# Altium PCB PCB.PcbDoc (part 1 of 2)
Units mm, origin at the board's own origin, x right, y up, seen from the top; angles counter-clockwise.
Board outline 50 x 50 mm, 4 copper layers (Top Layer, VCC, GND, Bottom Layer), stack 1.586 mm thick; 94 components, 159 nets, 762 pads, 321 vias.
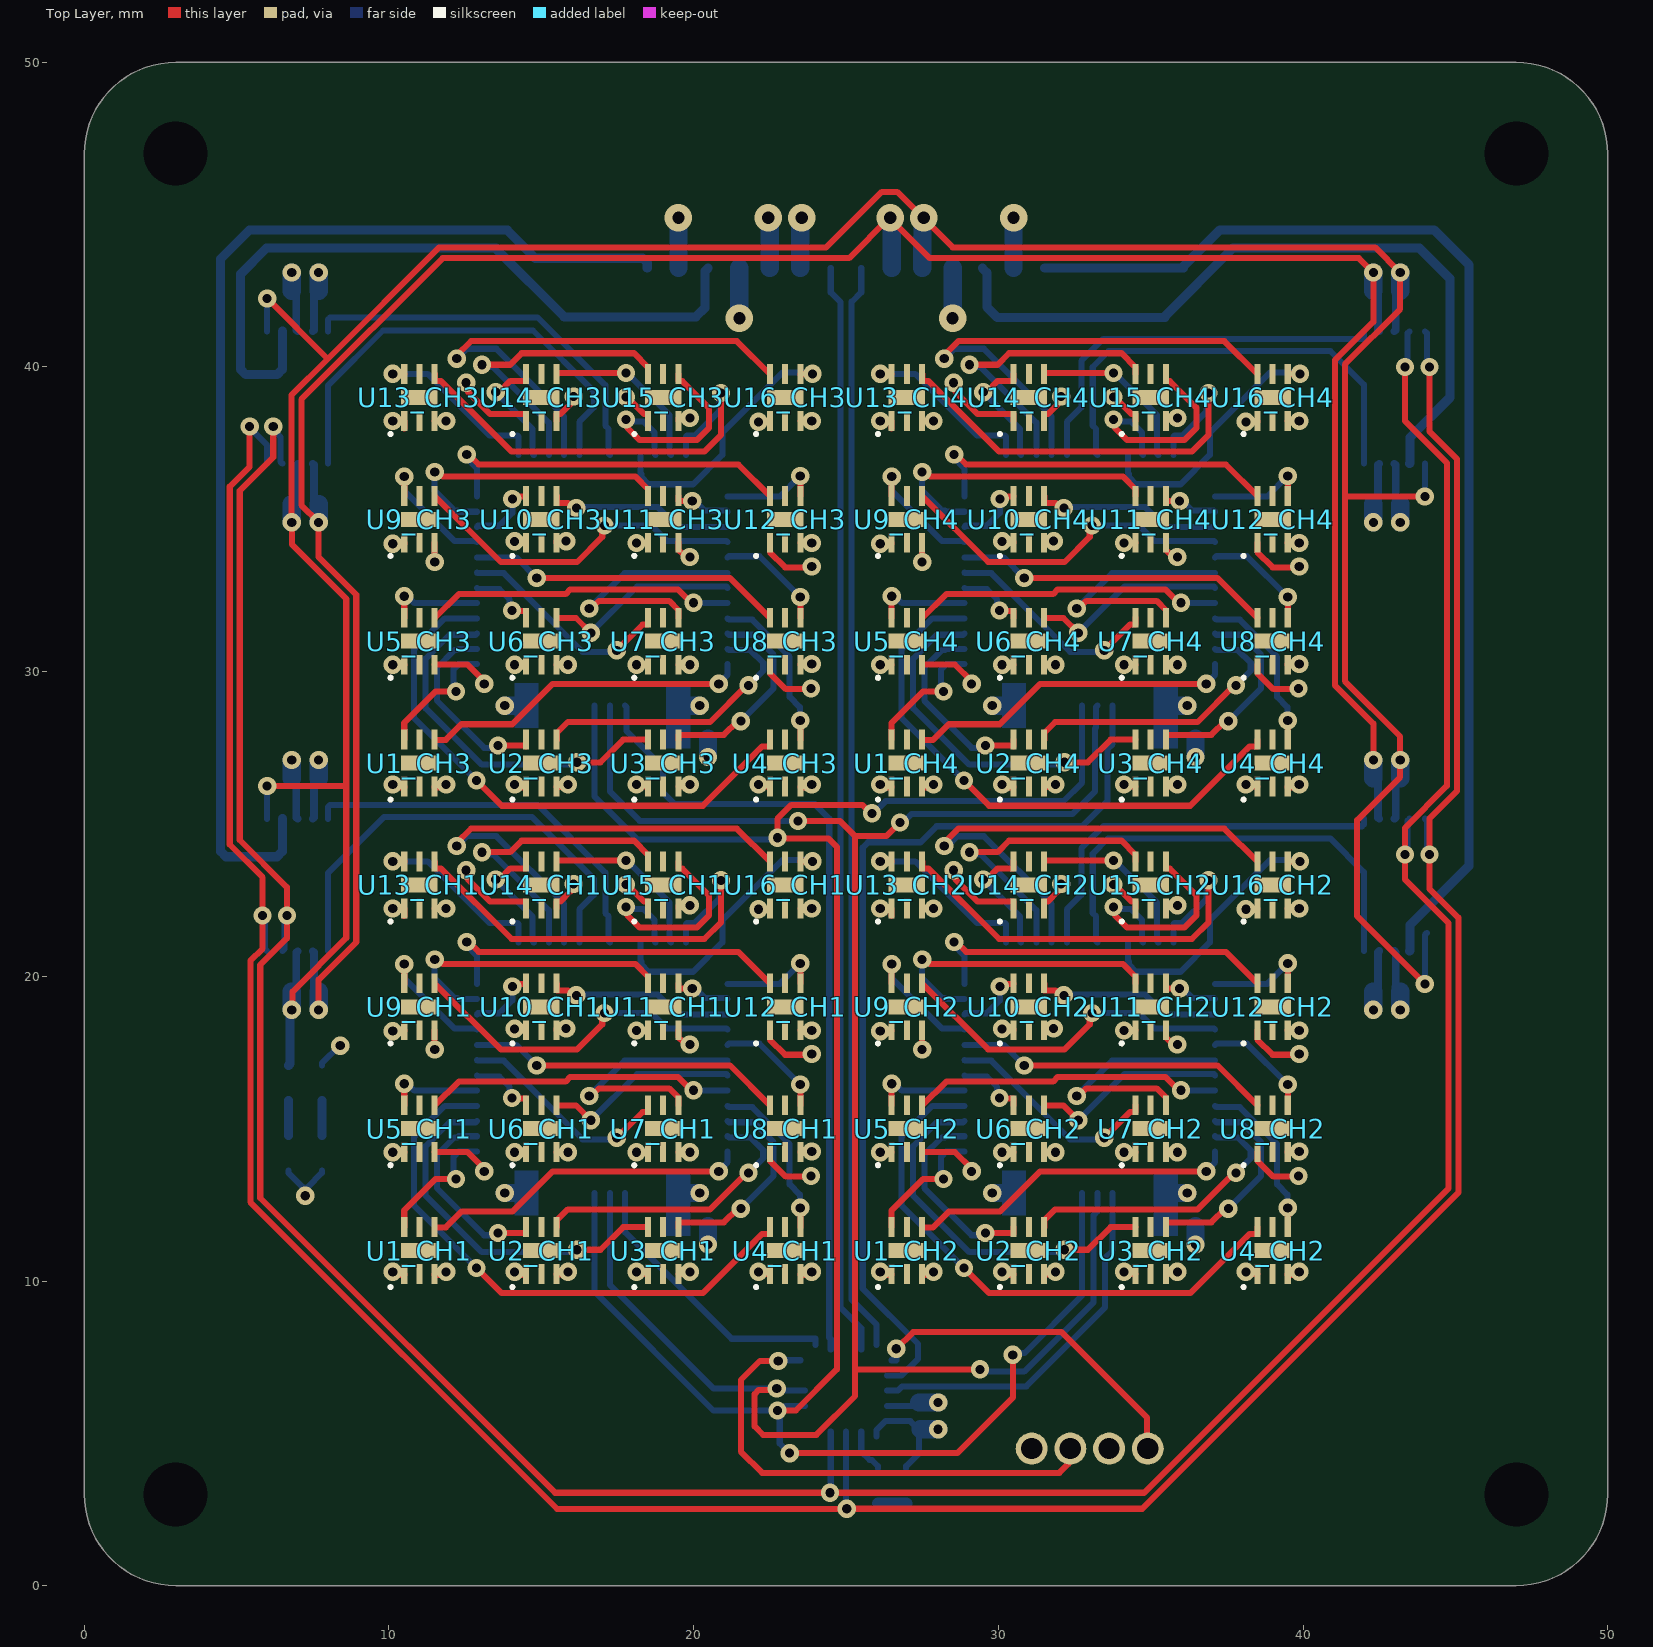
[diagram p0: Top Layer view]
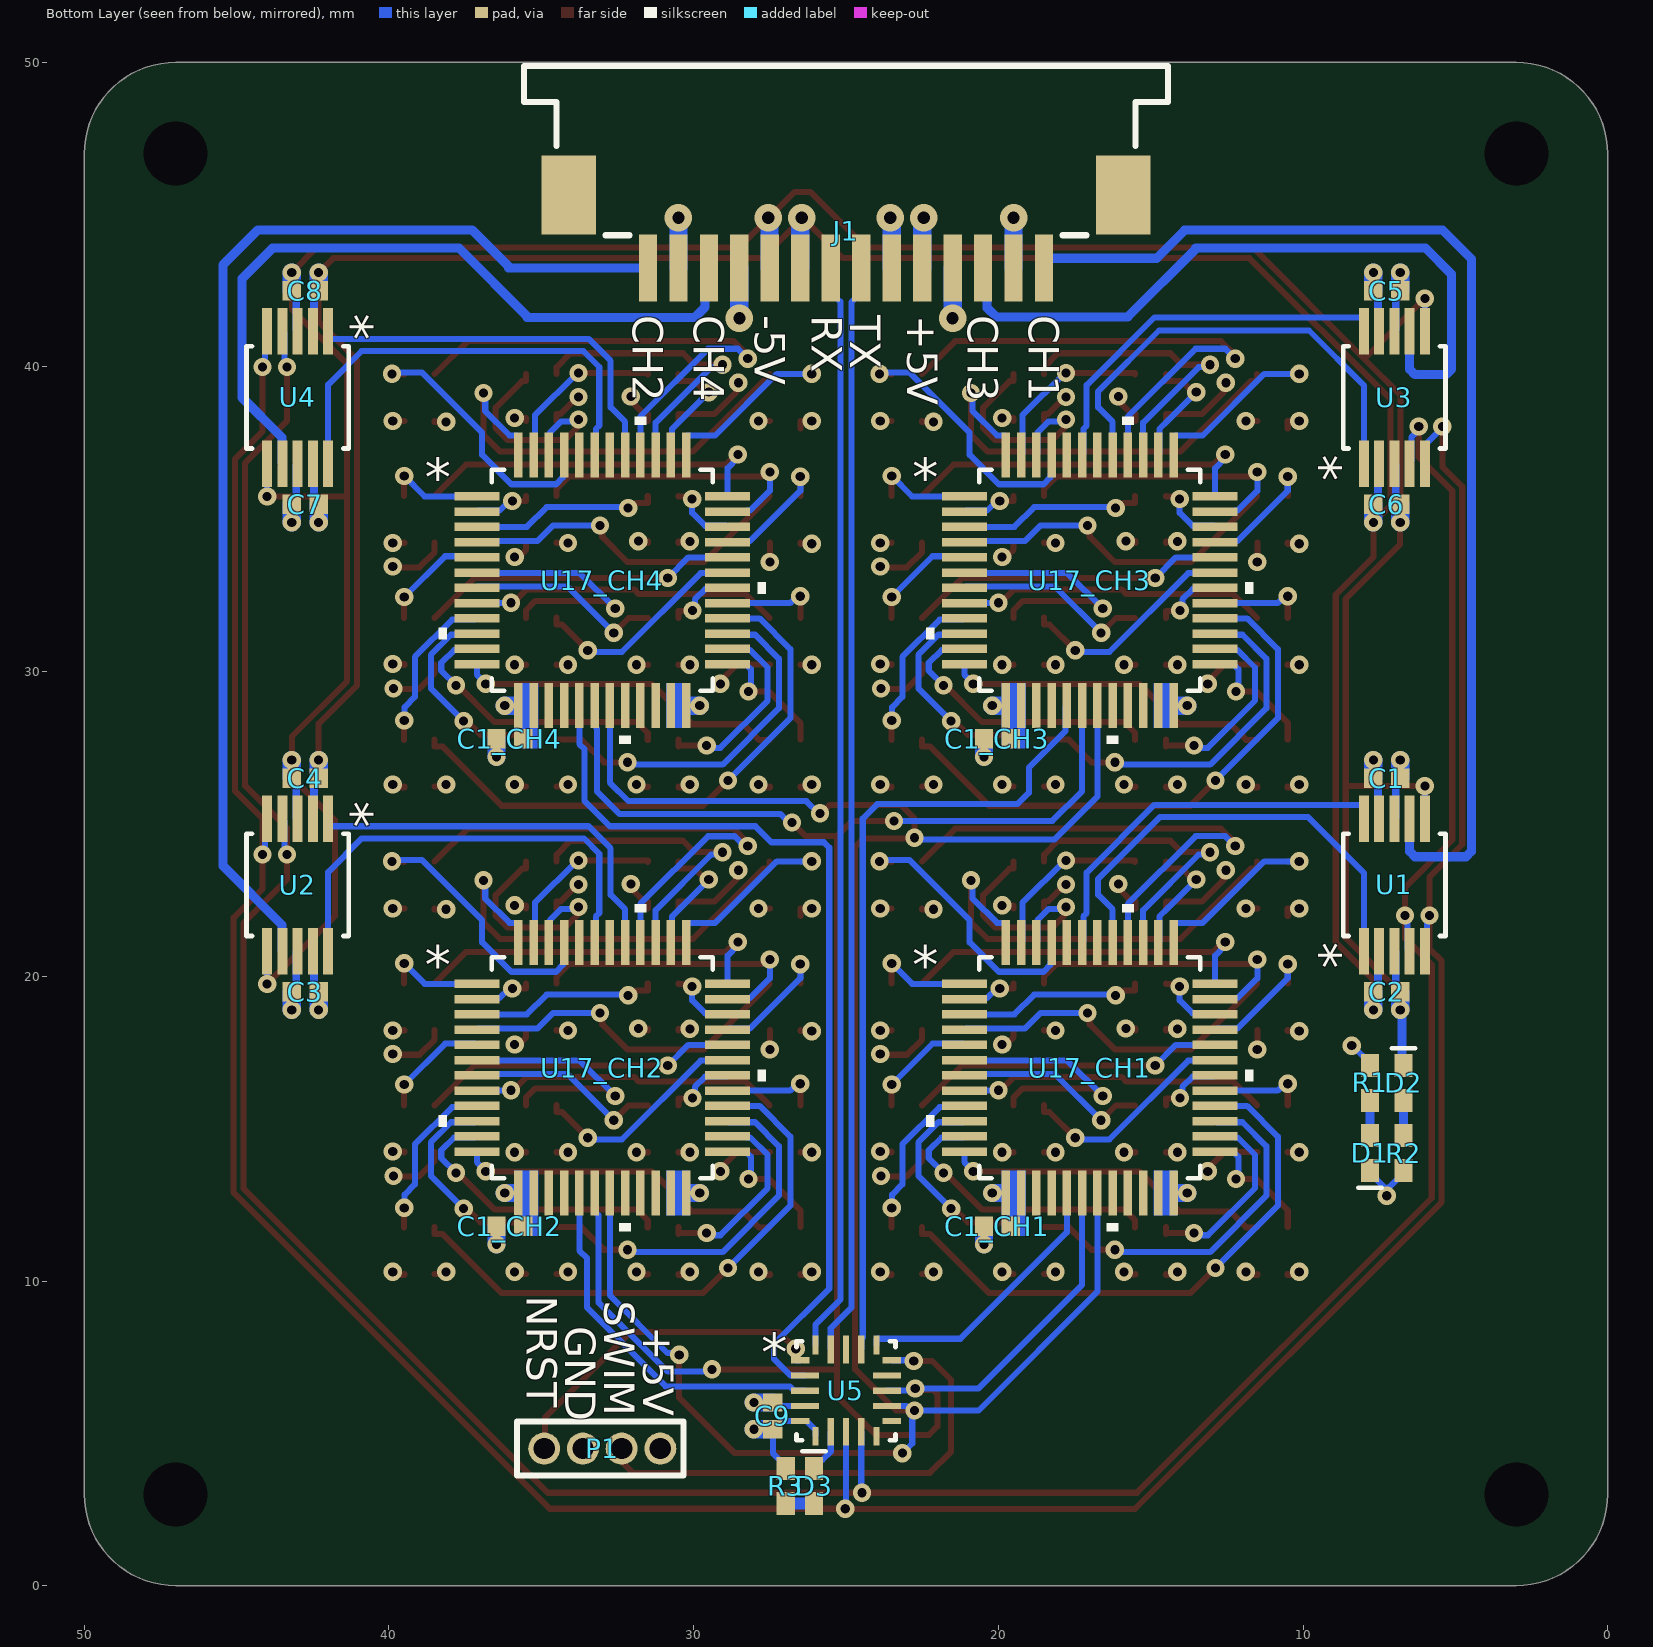
[diagram p1: Bottom Layer view, seen from below]
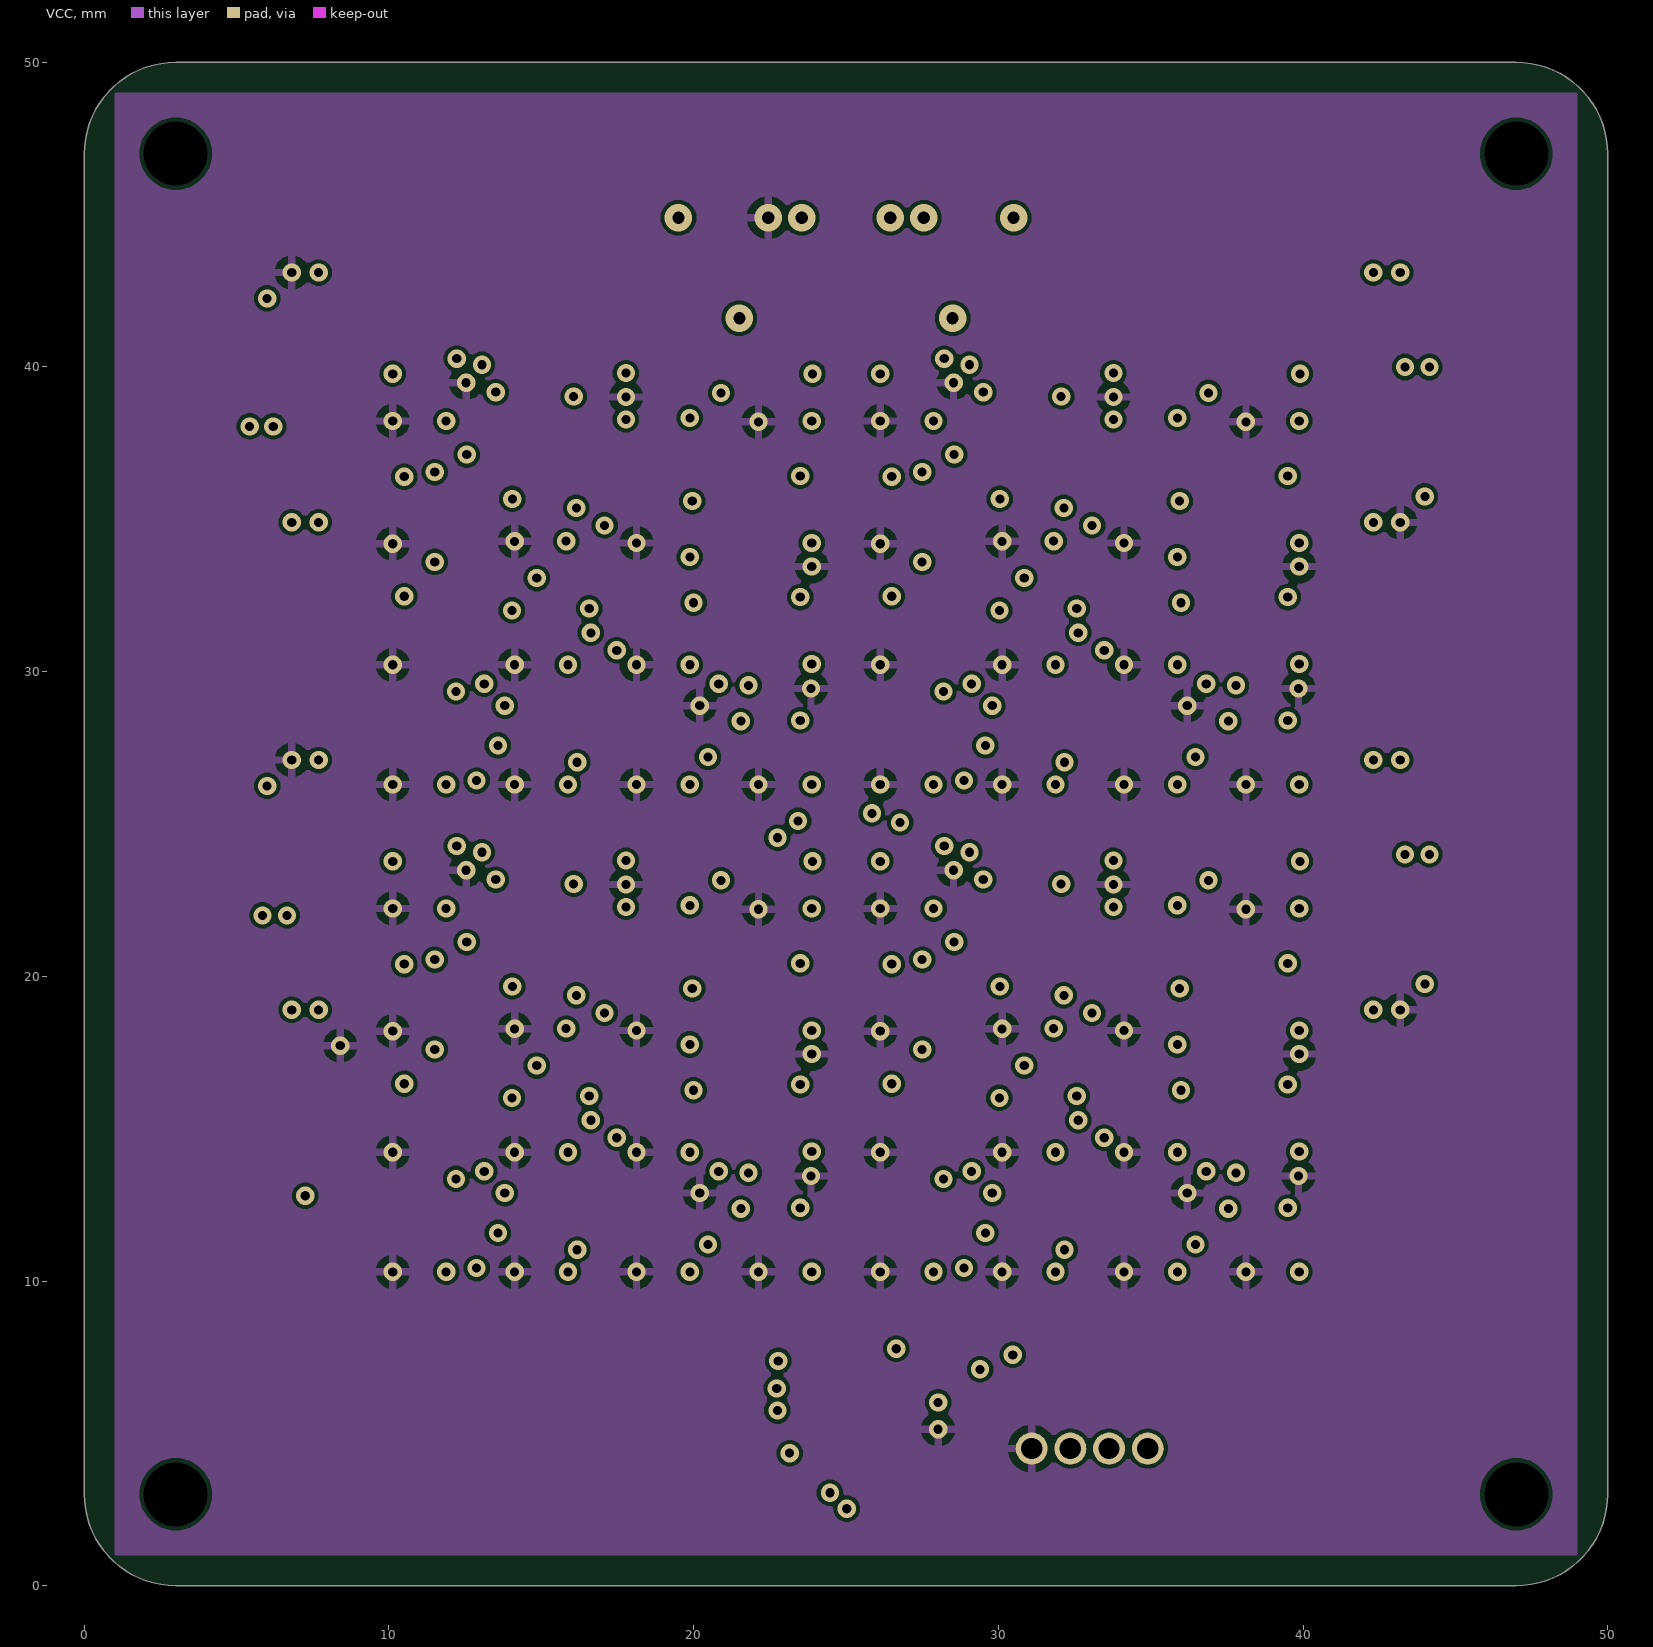
[diagram p2: VCC]
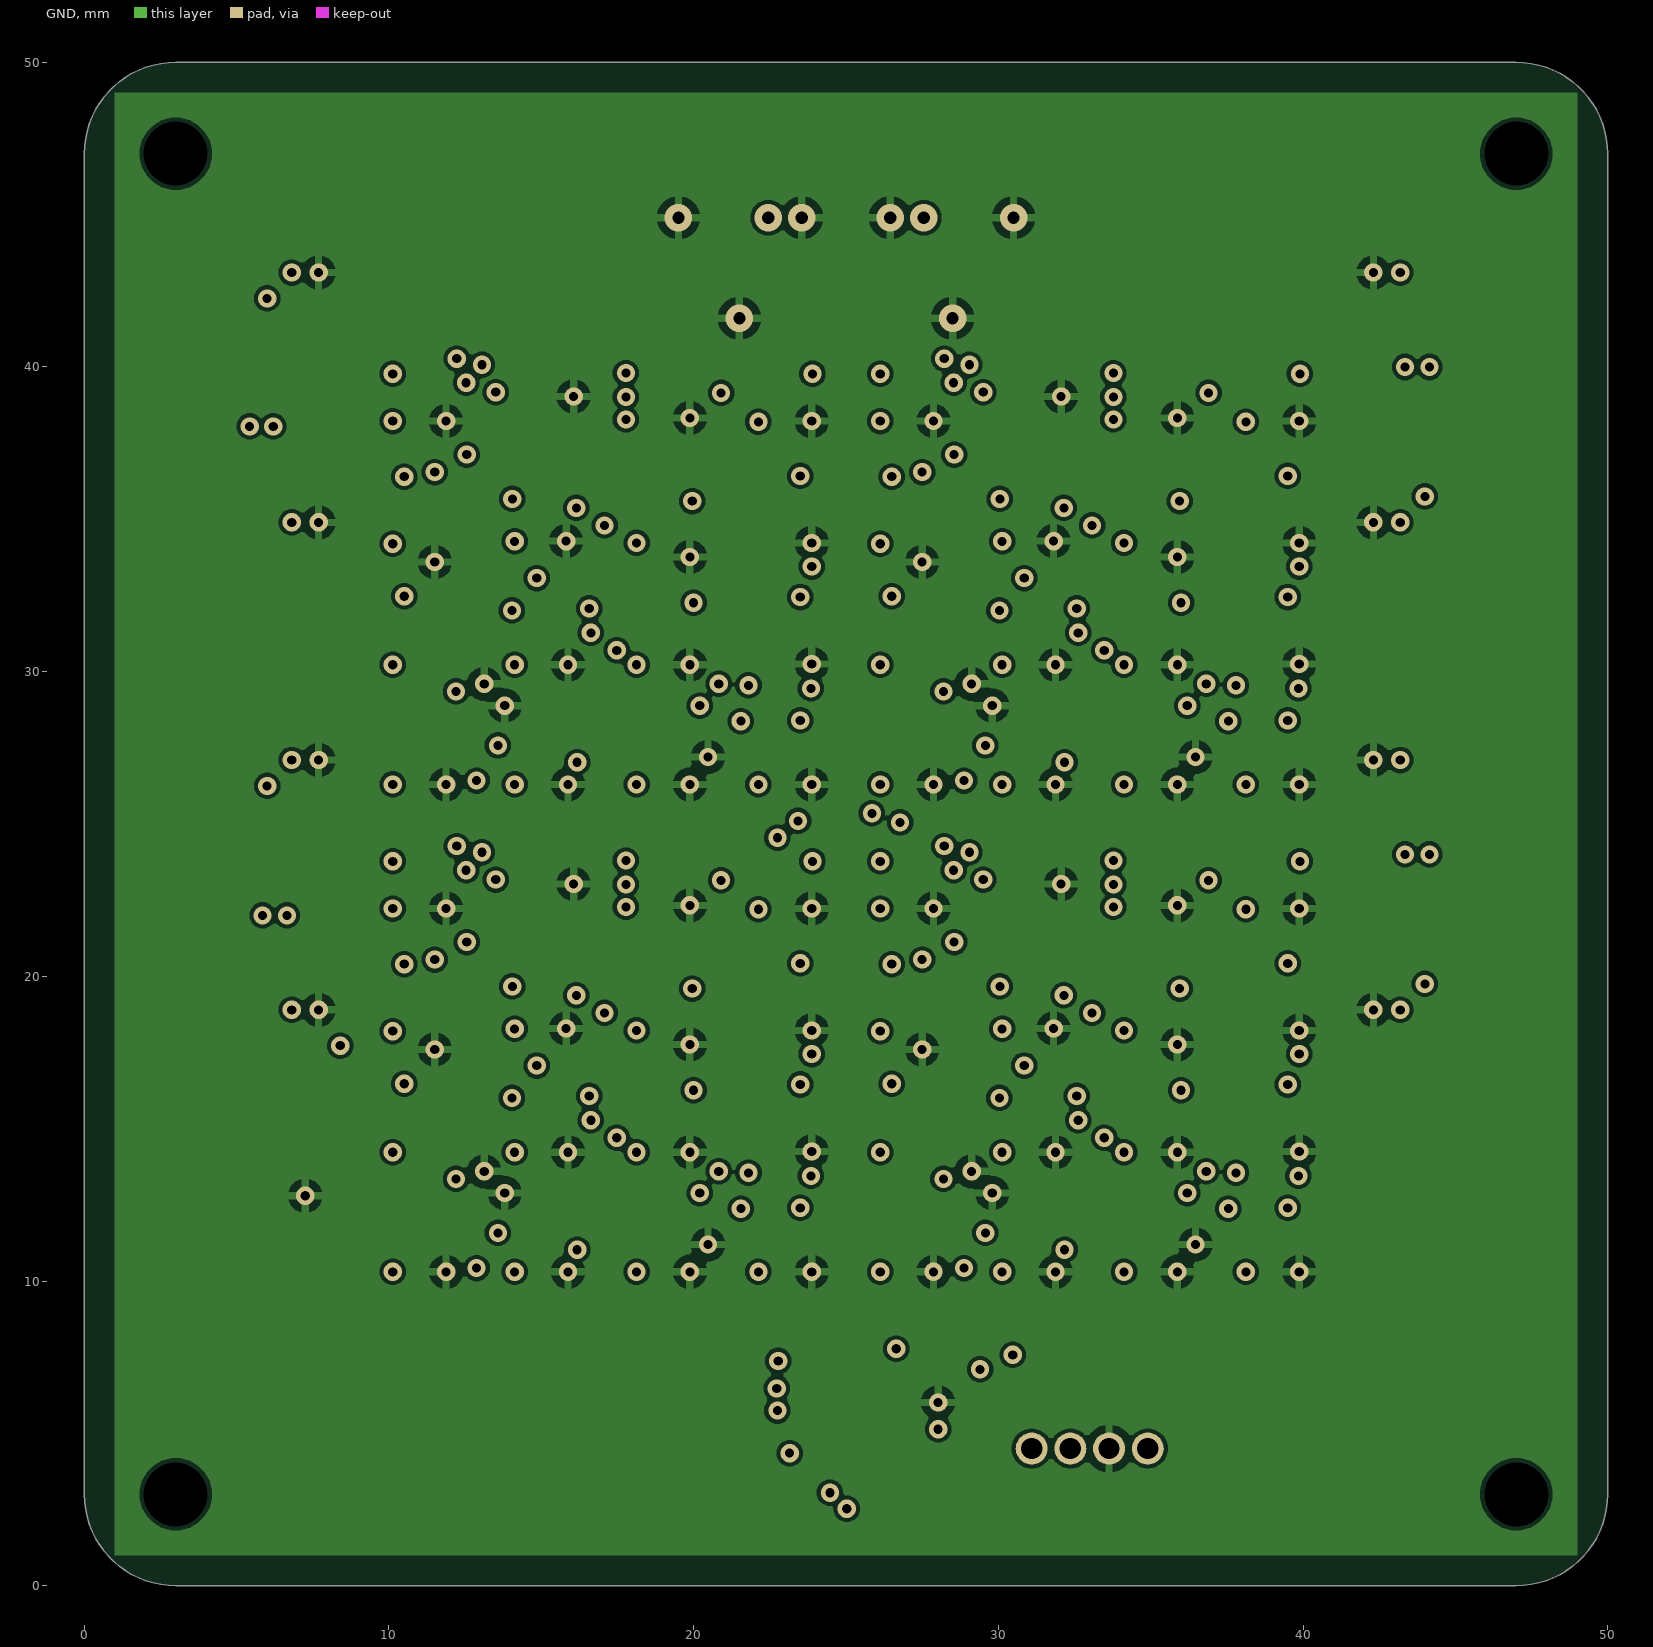
[diagram p3: GND]

## Layer stack, top to bottom
Top Solder: solder mask 0.0102, Solder Resist, Dk 3.5
Top Layer: signal copper 0.035
Dielectric 2: prepreg 0.2104, PP-006, Dk 4.6
VCC: signal copper 0.0152
Dielectric 1: dielectric 1.065, FR-4, Dk 4.6
GND: signal copper 0.0152
Dielectric 3: prepreg 0.2104, PP-006, Dk 4.6
Bottom Layer: signal copper 0.035
Bottom Solder: solder mask 0.0102, Solder Resist, Dk 3.5

## Board outline
0,3 0,47 cw(c3,47) 3,50 47,50 cw(c47,47) 50,47 50,3 cw(c47,3) 47,0 3,0 cw(c3,3)

## Design rules (kind name [scope] priority, off if disabled: settings)
Clearance [All] p1: gap=0.127 ignorepadtopadclearanceinfootprint=FALSE
HoleSize [All] p1: absolutevalues=TRUE maxlimit=2.54 minlimit=0.2 maxpercent=80.000 minpercent=20.000
MinimumSolderMaskSliver [All] p1: minsoldermaskwidth=0.102
PolygonConnect [All] p1: connectstyle=Relief reliefconductorwidth=0.254 reliefentries=4 polygonreliefangle="90 Angle" airgapwidth=0.254
RoomDefinition CH4 [InComponentClass('CH4')] p1: confinementstyle=ConfineIn formatcopy=TRUE lockcomponents=FALSE outline 25,25 41,25 41,41 25,41
RoomDefinition CH1 [InComponentClass('CH1')] p2: confinementstyle=ConfineIn formatcopy=TRUE lockcomponents=FALSE outline 9,9 25,9 25,25 9,25
RoomDefinition CH3 [InComponentClass('CH3')] p3: confinementstyle=ConfineIn formatcopy=TRUE lockcomponents=FALSE outline 9,25 25,25 25,41 9,41
RoomDefinition CH2 [InComponentClass('CH2')] p4: confinementstyle=ConfineIn formatcopy=TRUE lockcomponents=FALSE outline 25,9 41,9 41,25 25,25
RoutingVias [All] p1: holewidth=0.3 width=0.7 viastyle="Through Hole" minholewidth=0.2 minwidth=0.4 maxholewidth=0.711 maxwidth=1.27
SilkToSilkClearance [All] p1: silktosilkclearance=0.102
SilkToSolderMaskClearance [IsPad] p1: minsilkscreentomaskgap=0.1 clearancetoexposedcopper=TRUE
SolderMaskExpansion SolderMaskExpansion_Via [IsVia] p1: expansion=0.102 istentingtop=TRUE
SolderMaskExpansion [All] p2: expansion=0.102 istentingtop=FALSE
Width [All] p1: maxlimit=0.7 minlimit=0.1 preferedwidth=0.2
26 further rules are at their usual default settings.

## Classes and differential pairs
component class CT100-array: C1 C2 C3 C4 C5 C6 C7 C8 C9 D1 D2 D3 J1 P1 R1 R2 R3 U1 U2 U3 U4 U5
channel class CT100-channel: CH1 CH2 CH3 CH4
component class CH4: C1_CH4 U1_CH4 U2_CH4 U3_CH4 U4_CH4 U5_CH4 U6_CH4 U7_CH4 U8_CH4 U9_CH4 U10_CH4 U11_CH4 U12_CH4 U13_CH4 U14_CH4 U15_CH4 U16_CH4 U17_CH4
component class CH3: C1_CH3 U1_CH3 U2_CH3 U3_CH3 U4_CH3 U5_CH3 U6_CH3 U7_CH3 U8_CH3 U9_CH3 U10_CH3 U11_CH3 U12_CH3 U13_CH3 U14_CH3 U15_CH3 U16_CH3 U17_CH3
component class CH2: C1_CH2 U1_CH2 U2_CH2 U3_CH2 U4_CH2 U5_CH2 U6_CH2 U7_CH2 U8_CH2 U9_CH2 U10_CH2 U11_CH2 U12_CH2 U13_CH2 U14_CH2 U15_CH2 U16_CH2 U17_CH2
component class CH1: C1_CH1 U1_CH1 U2_CH1 U3_CH1 U4_CH1 U5_CH1 U6_CH1 U7_CH1 U8_CH1 U9_CH1 U10_CH1 U11_CH1 U12_CH1 U13_CH1 U14_CH1 U15_CH1 U16_CH1 U17_CH1

## Components (designator, comment, footprint, x,y, rotation, side; value= is the part's Value field where it differs from the comment)
C1 "0u1" CAP_0402 7.25,26.5 r0 bottom
C1_CH1 "0u1" CAP_0402 20.03,11.8 r180 bottom (schematic designator C1)
C1_CH2 "0u1" CAP_0402 36.03,11.8 r180 bottom (schematic designator C1)
C1_CH3 "0u1" CAP_0402 20.03,27.8 r180 bottom (schematic designator C1)
C1_CH4 "0u1" CAP_0402 36.03,27.8 r180 bottom (schematic designator C1)
C2 "0u1" CAP_0402 7.25,19.5 r0 bottom
C3 "0u1" CAP_0402 42.75,19.5 r180 bottom
C4 "0u1" CAP_0402 42.75,26.5 r180 bottom
C5 "0u1" CAP_0402 7.25,42.5 r0 bottom
C6 "0u1" CAP_0402 7.25,35.5 r0 bottom
C7 "0u1" CAP_0402 42.75,35.5 r180 bottom
C8 "0u1" CAP_0402 42.75,42.5 r180 bottom
C9 "1u" CAP_0402 27.4,5.575 r90 bottom
D1 "LED_0402" LED_0402 7.8,14.2 r270 bottom
D2 "LED_0402" LED_0402 6.7,16.5 r90 bottom
D3 "LED_0402" LED_0402 26.05,3.275 r90 bottom
J1 "FPC_pitch1_14pos" FPC_pitch1_14pos 25,47.1 r0 bottom locked
P1 "PIN_pitch1.27_4pos" PIN_PITCH1.27_4POS 33,4.5 r0 bottom
R1 "1k" RES_0402 7.8,16.5 r90 bottom
R2 "1k" RES_0402 6.7,14.2 r270 bottom
R3 "1k" RES_0402 26.975,3.275 r90 bottom
U1 "AD8253ARMZ" RM_10_ADI 7,23 r90 bottom
U1_CH1 "CT100" SON_6_CT100 11,11 r90 top (schematic designator U1)
U1_CH2 "CT100" SON_6_CT100 27,11 r90 top (schematic designator U1)
U1_CH3 "CT100" SON_6_CT100 11,27 r90 top (schematic designator U1)
U1_CH4 "CT100" SON_6_CT100 27,27 r90 top (schematic designator U1)
U2 "AD8253ARMZ" RM_10_ADI 43,23 r270 bottom
U2_CH1 "CT100" SON_6_CT100 15,11 r90 top (schematic designator U2)
U2_CH2 "CT100" SON_6_CT100 31,11 r90 top (schematic designator U2)
U2_CH3 "CT100" SON_6_CT100 15,27 r90 top (schematic designator U2)
U2_CH4 "CT100" SON_6_CT100 31,27 r90 top (schematic designator U2)
U3 "AD8253ARMZ" RM_10_ADI 7,39 r90 bottom
U3_CH1 "CT100" SON_6_CT100 19,11 r90 top (schematic designator U3)
U3_CH2 "CT100" SON_6_CT100 35,11 r90 top (schematic designator U3)
U3_CH3 "CT100" SON_6_CT100 19,27 r90 top (schematic designator U3)
U3_CH4 "CT100" SON_6_CT100 35,27 r90 top (schematic designator U3)
U4 "AD8253ARMZ" RM_10_ADI 43,39 r270 bottom
U4_CH1 "CT100" SON_6_CT100 23,11 r90 top (schematic designator U4)
U4_CH2 "CT100" SON_6_CT100 39,11 r90 top (schematic designator U4)
U4_CH3 "CT100" SON_6_CT100 23,27 r90 top (schematic designator U4)
U4_CH4 "CT100" SON_6_CT100 39,27 r90 top (schematic designator U4)
U5 "STM8S003F3U6TR" UFQFPN20_3X3X0P6 25,6.4 r180 bottom locked
U5_CH1 "CT100" SON_6_CT100 11,15 r90 top (schematic designator U5)
U5_CH2 "CT100" SON_6_CT100 27,15 r90 top (schematic designator U5)
U5_CH3 "CT100" SON_6_CT100 11,31 r90 top (schematic designator U5)
U5_CH4 "CT100" SON_6_CT100 27,31 r90 top (schematic designator U5)
U6_CH1 "CT100" SON_6_CT100 15,15 r90 top (schematic designator U6)
U6_CH2 "CT100" SON_6_CT100 31,15 r90 top (schematic designator U6)
U6_CH3 "CT100" SON_6_CT100 15,31 r90 top (schematic designator U6)
U6_CH4 "CT100" SON_6_CT100 31,31 r90 top (schematic designator U6)
U7_CH1 "CT100" SON_6_CT100 19,15 r90 top (schematic designator U7)
U7_CH2 "CT100" SON_6_CT100 35,15 r90 top (schematic designator U7)
U7_CH3 "CT100" SON_6_CT100 19,31 r90 top (schematic designator U7)
U7_CH4 "CT100" SON_6_CT100 35,31 r90 top (schematic designator U7)
U8_CH1 "CT100" SON_6_CT100 23,15 r90 top (schematic designator U8)
U8_CH2 "CT100" SON_6_CT100 39,15 r90 top (schematic designator U8)
U8_CH3 "CT100" SON_6_CT100 23,31 r90 top (schematic designator U8)
U8_CH4 "CT100" SON_6_CT100 39,31 r90 top (schematic designator U8)
U9_CH1 "CT100" SON_6_CT100 11,19 r90 top (schematic designator U9)
U9_CH2 "CT100" SON_6_CT100 27,19 r90 top (schematic designator U9)
U9_CH3 "CT100" SON_6_CT100 11,35 r90 top (schematic designator U9)
U9_CH4 "CT100" SON_6_CT100 27,35 r90 top (schematic designator U9)
U10_CH1 "CT100" SON_6_CT100 15,19 r90 top (schematic designator U10)
U10_CH2 "CT100" SON_6_CT100 31,19 r90 top (schematic designator U10)
U10_CH3 "CT100" SON_6_CT100 15,35 r90 top (schematic designator U10)
U10_CH4 "CT100" SON_6_CT100 31,35 r90 top (schematic designator U10)
U11_CH1 "CT100" SON_6_CT100 19,19 r90 top (schematic designator U11)
U11_CH2 "CT100" SON_6_CT100 35,19 r90 top (schematic designator U11)
U11_CH3 "CT100" SON_6_CT100 19,35 r90 top (schematic designator U11)
U11_CH4 "CT100" SON_6_CT100 35,35 r90 top (schematic designator U11)
U12_CH1 "CT100" SON_6_CT100 23,19 r90 top (schematic designator U12)
U12_CH2 "CT100" SON_6_CT100 39,19 r90 top (schematic designator U12)
U12_CH3 "CT100" SON_6_CT100 23,35 r90 top (schematic designator U12)
U12_CH4 "CT100" SON_6_CT100 39,35 r90 top (schematic designator U12)
U13_CH1 "CT100" SON_6_CT100 11,23 r90 top (schematic designator U13)
U13_CH2 "CT100" SON_6_CT100 27,23 r90 top (schematic designator U13)
U13_CH3 "CT100" SON_6_CT100 11,39 r90 top (schematic designator U13)
U13_CH4 "CT100" SON_6_CT100 27,39 r90 top (schematic designator U13)
U14_CH1 "CT100" SON_6_CT100 15,23 r90 top (schematic designator U14)
U14_CH2 "CT100" SON_6_CT100 31,23 r90 top (schematic designator U14)
U14_CH3 "CT100" SON_6_CT100 15,39 r90 top (schematic designator U14)
U14_CH4 "CT100" SON_6_CT100 31,39 r90 top (schematic designator U14)
U15_CH1 "CT100" SON_6_CT100 19,23 r90 top (schematic designator U15)
U15_CH2 "CT100" SON_6_CT100 35,23 r90 top (schematic designator U15)
U15_CH3 "CT100" SON_6_CT100 19,39 r90 top (schematic designator U15)
U15_CH4 "CT100" SON_6_CT100 35,39 r90 top (schematic designator U15)
U16_CH1 "CT100" SON_6_CT100 23,23 r90 top (schematic designator U16)
U16_CH2 "CT100" SON_6_CT100 39,23 r90 top (schematic designator U16)
U16_CH3 "CT100" SON_6_CT100 23,39 r90 top (schematic designator U16)
U16_CH4 "CT100" SON_6_CT100 39,39 r90 top (schematic designator U16)
U17_CH1 "ADG725" SU_48_ADI 17,17 r180 bottom (schematic designator U17)
U17_CH2 "ADG725" SU_48_ADI 33,17 r180 bottom (schematic designator U17)
U17_CH3 "ADG725" SU_48_ADI 17,33 r180 bottom (schematic designator U17)
U17_CH4 "ADG725" SU_48_ADI 33,33 r180 bottom (schematic designator U17)

## Footprints (in the part's own frame and the unit in brackets; to place one, negate y for a bottom-side part, rotate by r counter-clockwise, add the part's x,y. Pads: shape width x height; smd on the part's side, far side on the other; paste and mask are expansions set on the pad)
CAP_0402 [mm] "Chip Capacitor, 2-Leads, Body 1.02x0.51mm, IPC Medium Density"
  rect 0.6x0.64 smd mask+0.076: 1(-0.44,0) 2(0.44,0)
  body extent -0.5,-0.26 0.5,0.26, height 0.52
FPC_pitch1_14pos [mm]
  rect 0.6x2.2 smd: 1(-6.5,3.85) 2(-5.5,3.85) 3(-4.5,3.85) 4(-3.5,3.85) 5(-2.5,3.85) 6(-1.5,3.85) 7(-0.5,3.85) 8(0.5,3.85) 9(1.5,3.85) 10(2.5,3.85) 11(3.5,3.85) 12(4.5,3.85) 13(5.5,3.85) 14(6.5,3.85)
  rect 1.8x2.6 smd: MP1(-9.1,1.45) MP2(9.1,1.45)
  silkscreen extent -10.58,-2.78 10.58,2.78, body extent -10.5,-2.7 10.5,4.4, height 3.02
LED_0402 [mm] "Chip Diode, 2-Leads, Body 1.00x0.50mm, IPC Medium Density"
  rect 0.75x0.6 smd: 1(-0.575,0) 2(0.575,0)
  silkscreen extent 1.14,-0.38 1.14,0.38, body extent -0.5,-0.25 0.5,0.25, height 0.21
PIN_PITCH1.27_4POS [mm]
  round 1.05 hole 0.7 mask+0.051: 1(-1.905,0) 2(-0.635,0) 3(0.635,0) 4(1.905,0)
  silkscreen extent -2.67,-0.89 2.79,0.89
RES_0402 [mm] "Chip Resistor, 2-Leads, Body 1.0x0.5mm, IPC Medium Density"
  rect 0.75x0.6 smd: 1(-0.575,0) 2(0.575,0)
  body extent -0.5,-0.25 0.5,0.25, height 0.35
RM_10_ADI [mil]
  rect 60x13 smd paste+0 mask+0: 1(-85.5,39.37) 2(-85.5,19.69) 3(-85.5,0) 4(-85.5,-19.68) 5(-85.5,-39.37) 6(85.5,-39.37) 7(85.5,-19.68) 8(85.5,0) 9(85.5,19.69) 10(85.5,39.37)
  silkscreen extent -66,-66 66,66, body extent -101,-61 101,61, height 43
SON_6_CT100 [mm] "SON, 6-Leads, Body 1.50x1.50mm, Pitch 0.50mm, Thermal Pad 1.20x0.49mm, IPC Medium Density"
  rect 0.65x0.2 smd mask+0.05: 1(-0.77,0.5) 2(-0.77,0) 3(-0.77,-0.5) 4(0.77,-0.5) 5(0.77,0) 6(0.77,0.5)
  rect 0.49x1.2 smd mask+0.048: 7(0,0)
  silkscreen extent -1.25,0.9 -1.15,1, body extent -0.8,-0.8 0.8,0.8, height 0.5
SU_48_ADI [mil]
  rect 58x11 smd paste+0 mask+0: 1(-162,108.27) 2(-162,88.58) 3(-162,68.9) 4(-162,49.21) 5(-162,29.53) 6(-162,9.84) 7(-162,-9.84) 8(-162,-29.53) 9(-162,-49.21) 10(-162,-68.9) 11(-162,-88.58) 12(-162,-108.27) 25(162,-108.27) 26(162,-88.58) 27(162,-68.9) 28(162,-49.21) 29(162,-29.53) 30(162,-9.84) 31(162,9.84) 32(162,29.53) 33(162,49.21) 34(162,68.9) 35(162,88.58) 36(162,108.27)
  rect 11x58 smd paste+0 mask+0: 13(-108.27,-162) 14(-88.58,-162) 15(-68.9,-162) 16(-49.21,-162) 17(-29.53,-162) 18(-9.84,-162) 19(9.84,-162) 20(29.53,-162) 21(49.21,-162) 22(68.9,-162) 23(88.58,-162) 24(108.27,-162) 37(108.27,162) 38(88.58,162) 39(68.9,162) 40(49.21,162) 41(29.53,162) 42(9.84,162) 43(-9.84,162) 44(-29.53,162) 45(-49.21,162) 46(-68.9,162) 47(-88.58,162) 48(-108.27,162)
  silkscreen extent -211,-211 211,211, body extent -177,-177 177,177, height 47
UFQFPN20_3X3X0P6 [mil]
  rect 24x8 smd paste+0 mask+0: 1(-59,39.37) 5(-59,-39.37) 11(59,-39.37) 15(59,39.37)
  rect 36x8 smd paste+0 mask+0: 2(-53,19.68) 3(-53,0) 4(-53,-19.69) 12(53,-19.69) 13(53,0) 14(53,19.68)
  rect 8x24 smd paste+0 mask+0: 6(-39.37,-59) 10(39.37,-59) 16(39.37,59) 20(-39.37,59)
  rect 8x36 smd paste+0 mask+0: 7(-19.68,-53) 8(0,-53) 9(19.68,-53) 17(19.68,53) 18(0,53) 19(-19.68,53)
  silkscreen extent -64,-64 64,64, body extent -59,-59 59,59, height 24

## Part data
C1 C1_CH1 C1_CH2 C1_CH3 C1_CH4 C2 C3 C4 C5 C6 C7 C8 C9: library part CAP_0402, "Capacitor SMD 0402", Voltage=50V
  C1 C1_CH1 C1_CH2 C1_CH3 C1_CH4 C2 C3 C4 C5 C6 C7 C8: Capacitance=0u1
  C9: Capacitance=1u
D1 D2 D3: "LED SMD 0402"
J1: "14 Position 1 mm FFC & FPC Connectors"
R1 R2 R3: library part RES_0402, "Resistor SMD 0402", Resistance=1k
U1 U2 U3 U4: "No Description Available", Mfr_Name="Analog Devices Inc", Copyright="Copyright (C) 2023 Ultra Librarian. All rights reserved.", Manufacturer_Part_Number=AD8253ARMZ, RefDes=RefDes, Type=DEV
U1_CH1 U1_CH2 U1_CH3 U1_CH4 U2_CH1 U2_CH2 U2_CH3 U2_CH4 U3_CH1 U3_CH2 U3_CH3 U3_CH4 U4_CH1 U4_CH2 U4_CH3 U4_CH4 U5_CH1 U5_CH2 U5_CH3 U5_CH4 U6_CH1 U6_CH2 U6_CH3 U6_CH4 U7_CH1 U7_CH2 U7_CH3 U7_CH4 U8_CH1 U8_CH2 U8_CH3 U8_CH4 U9_CH1 U9_CH2 U9_CH3 U9_CH4 U10_CH1 U10_CH2 U10_CH3 U10_CH4 U11_CH1 U11_CH2 U11_CH3 U11_CH4 U12_CH1 U12_CH2 U12_CH3 U12_CH4 U13_CH1 U13_CH2 U13_CH3 U13_CH4 U14_CH1 U14_CH2 U14_CH3 U14_CH4 U15_CH1 U15_CH2 U15_CH3 U15_CH4 U16_CH1 U16_CH2 U16_CH3 U16_CH4: library part CT100LW-ID6-M, "TMR Sensor, Linear, -40 to 85deg C", Manufacturer="Crocus Technology", Manufacturer Part Number=CT100LW-ID6, RoHS=Yes
U5: "No Description Available", Mfr_Name=STMicroelectronics, Copyright="Copyright (C) 2023 Ultra Librarian. All rights reserved.", Manufacturer_Part_Number=STM8S003F3U6TR, RefDes=RefDes, Type=Type
U17_CH1 U17_CH2 U17_CH3 U17_CH4: library part ADG725BSUZ, "Differential 16-Channel, Serially Controlled 3.5 Ω 1.8 V to 5.5 V, ±2.5 V, Analog Multiplexer", Mfr_Name="Analog Devices Inc", Manufacturer_Part_Number=ADG725BSUZ, RefDes=RefDes, Type=DEV

## Free pads (board coordinates)
  round 1.524 hole 2.1 unplated: 3(3,3) 3(3,47) 3(47,3) 3(47,47)

## Via types
v1: diameter 0.6, hole 0.3, Top Layer to Bottom Layer, tented both sides, 313 vias
v2: diameter 0.9, hole 0.4, Top Layer to Bottom Layer, tented both sides, 8 vias

## Nets (pads, with @x,y where several pads share a name; then routed paths per layer and width w, separated by ;. In a path a pad name is that pad's centre, name@x,y a point inside that pad or via, vN(x,y) a via of type N, cw(c..) or ccw(c..) an arc to the next point about the centre after c; other vN are vias at no path point)
+5V: C1.1 C1_CH1.2 C1_CH2.2 C1_CH3.2 C1_CH4.2 C3.1 C5.1 C7.1 C9.1 J1.5 P1.1 R1.2 R3.2 U1.8 U1_CH1.1 U1_CH2.1 U1_CH3.1 U1_CH4.1 U2.8 U2_CH1.1 U2_CH2.1 U2_CH3.1 U2_CH4.1 U3.8 U3_CH1.1 U3_CH2.1 U3_CH3.1 U3_CH4.1 U4.8 U4_CH1.1 U4_CH2.1 U4_CH3.1 U4_CH4.1 U5.5 U5.6 U5_CH1.1 U5_CH2.1 U5_CH3.1 U5_CH4.1 U6_CH1.1 U6_CH2.1 U6_CH3.1 U6_CH4.1 U7_CH1.1 U7_CH2.1 U7_CH3.1 U7_CH4.1 U8_CH1.1 U8_CH2.1 U8_CH3.1 U8_CH4.1 U9_CH1.1 U9_CH2.1 U9_CH3.1 U9_CH4.1 U10_CH1.1 U10_CH2.1 U10_CH3.1 U10_CH4.1 U11_CH1.1 U11_CH2.1 U11_CH3.1 U11_CH4.1 U12_CH1.1 U12_CH2.1 U12_CH3.1 U12_CH4.1 U13_CH1.1 U13_CH2.1 U13_CH3.1 U13_CH4.1 U14_CH1.1 U14_CH2.1 U14_CH3.1 U14_CH4.1 U15_CH1.1 U15_CH2.1 U15_CH3.1 U15_CH4.1 U16_CH1.1 U16_CH2.1 U16_CH3.1 U16_CH4.1 U17_CH1.13 U17_CH1.14 U17_CH2.13 U17_CH2.14 U17_CH3.13 U17_CH3.14 U17_CH4.13 U17_CH4.14 | length 67.9
  Top Layer w0.2: v1@10.125,10.2 10.5,10.2 U1_CH1.1@10.5,10.23 ; v1(10.125,14.225) 10.5,14.225 U5_CH1.1@10.5,14.23 ; v1(10.125,18.2) 10.5,18.2 U9_CH1.1@10.5,18.23 ; v1(10.125,22.225) 10.5,22.225 U13_CH1.1@10.5,22.23 U13_CH1.1@10.5,21.984 ; v1@10.125,26.2 10.5,26.2 U1_CH3.1@10.5,26.23 ; v1(10.125,30.225) 10.5,30.225 U5_CH3.1@10.5,30.23 ; v1(10.125,34.2) 10.5,34.2 U9_CH3.1@10.5,34.23 ; v1(10.125,38.225) 10.5,38.225 U13_CH3.1@10.5,38.23 U13_CH3.1@10.5,37.984 ; v1(12.533,23.483) 12.602,23.414 12.602,23.173 13.32,22.455 14.5,22.455 U14_CH1.1@14.5,22.23 ; v1(12.533,39.483) 12.602,39.414 12.602,39.173 13.32,38.455 14.5,38.455 U14_CH3.1@14.5,38.23 ; v1@14.125,10.2 14.5,10.2 U2_CH1.1@14.5,10.23 ; v1(14.125,14.225) 14.5,14.225 U6_CH1.1@14.5,14.23 ; v1(14.125,18.277) 14.5,18.277 U10_CH1.1@14.5,18.23 ; v1@14.125,26.2 14.5,26.2 U2_CH3.1@14.5,26.23 ; v1(14.125,30.225) 14.5,30.225 U6_CH3.1@14.5,30.23 ; v1(14.125,34.277) 14.5,34.277 U10_CH3.1@14.5,34.23 ; v1(17.777,23.013) 17.821,23.013 18.379,22.455 18.5,22.455 U15_CH1.1@18.5,22.23 ; v1(17.777,39.013) 17.821,39.013 18.379,38.455 18.5,38.455 U15_CH3.1@18.5,38.23 ; v1@18.125,10.225 18.5,10.225 U3_CH1.1@18.5,10.23 ; v1(18.125,14.225) 18.5,14.225 U7_CH1.1@18.5,14.23 ; v1(18.125,18.225) 18.5,18.225 U11_CH1.1@18.5,18.23 ; v1@18.125,26.225 18.5,26.225 U3_CH3.1@18.5,26.23 ; v1(18.125,30.225) 18.5,30.225 U7_CH3.1@18.5,30.23 ; v1(18.125,34.225) 18.5,34.225 U11_CH3.1@18.5,34.23 ; v1@22.125,10.225 22.5,10.225 U4_CH1.1@22.5,10.23 ; v1(22.125,22.2) 22.5,22.2 U16_CH1.1@22.5,22.23 ; v1@22.125,26.225 22.5,26.225 U4_CH3.1@22.5,26.23 ; v1(22.125,38.2) 22.5,38.2 U16_CH3.1@22.5,38.23 ; U8_CH1.1@22.5,14.23 22.5,13.95 23.025,13.425 23.825,13.425 v1(23.85,13.45) ; U12_CH1.1@22.5,18.23 22.5,17.925 23,17.425 23.85,17.425 v1(23.875,17.45) ; U8_CH3.1@22.5,30.23 22.5,29.95 23.025,29.425 23.825,29.425 v1(23.85,29.45) ; U12_CH3.1@22.5,34.23 22.5,33.925 23,33.425 23.85,33.425 v1(23.875,33.45) ; v1@26.125,10.2 26.5,10.2 U1_CH2.1@26.5,10.23 ; v1(26.125,14.225) 26.5,14.225 U5_CH2.1@26.5,14.23 ; v1(26.125,18.2) 26.5,18.2 U9_CH2.1@26.5,18.23 ; v1(26.125,22.225) 26.5,22.225 U13_CH2.1@26.5,22.23 U13_CH2.1@26.5,21.984 ; v1@26.125,26.2 26.5,26.2 U1_CH4.1@26.5,26.23 ; v1(26.125,30.225) 26.5,30.225 U5_CH4.1@26.5,30.23 ; v1(26.125,34.2) 26.5,34.2 U9_CH4.1@26.5,34.23 ; v1(26.125,38.225) 26.5,38.225 U13_CH4.1@26.5,38.23 U13_CH4.1@26.5,37.984 ; v1(28.533,23.483) 28.602,23.414 28.602,23.173 29.32,22.455 30.5,22.455 U14_CH2.1@30.5,22.23 ; v1(28.533,39.483) 28.602,39.414 28.602,39.173 29.32,38.455 30.5,38.455 U14_CH4.1@30.5,38.23 ; v1@30.125,10.2 30.5,10.2 U2_CH2.1@30.5,10.23 ; v1(30.125,14.225) 30.5,14.225 U6_CH2.1@30.5,14.23 ; v1(30.125,18.277) 30.5,18.277 U10_CH2.1@30.5,18.23 ; v1@30.125,26.2 30.5,26.2 U2_CH4.1@30.5,26.23 ; v1(30.125,30.225) 30.5,30.225 U6_CH4.1@30.5,30.23 ; v1(30.125,34.277) 30.5,34.277 U10_CH4.1@30.5,34.23 ; v1(33.777,23.013) 33.821,23.013 34.379,22.455 34.5,22.455 U15_CH2.1@34.5,22.23 ; v1(33.777,39.013) 33.821,39.013 34.379,38.455 34.5,38.455 U15_CH4.1@34.5,38.23 ; v1@34.125,10.225 34.5,10.225 U3_CH2.1@34.5,10.23 ; v1(34.125,14.225) 34.5,14.225 U7_CH2.1@34.5,14.23 ; v1(34.125,18.225) 34.5,18.225 U11_CH2.1@34.5,18.23 ; v1@34.125,26.225 34.5,26.225 U3_CH4.1@34.5,26.23 ; v1(34.125,30.225) 34.5,30.225 U7_CH4.1@34.5,30.23 ; v1(34.125,34.225) 34.5,34.225 U11_CH4.1@34.5,34.23 ; v1@38.125,10.225 38.5,10.225 U4_CH2.1@38.5,10.23 ; v1(38.125,22.2) 38.5,22.2 U16_CH2.1@38.5,22.23 ; v1@38.125,26.225 38.5,26.225 U4_CH4.1@38.5,26.23 ; v1(38.125,38.2) 38.5,38.2 U16_CH4.1@38.5,38.23 ; U8_CH2.1@38.5,14.23 38.5,13.95 39.025,13.425 39.825,13.425 v1(39.85,13.45) ; U12_CH2.1@38.5,18.23 38.5,17.925 39,17.425 39.85,17.425 v1(39.875,17.45) ; U8_CH4.1@38.5,30.23 38.5,29.95 39.025,29.425 39.825,29.425 v1(39.85,29.45) ; U12_CH4.1@38.5,34.23 38.5,33.925 39,33.425 39.85,33.425 v1(39.875,33.45)
  Bottom Layer w0.2: R1.2@7.8,17.075 7.8,17.15 8.375,17.725 v1(8.4,17.725) ; U5.6@26,4.901 26,5.105 26.295,5.4 U5.5@26.499,5.4 27.115,5.4 27.38,5.135 C9.1@27.4,5.135 27.4,4.35 26.975,3.925 R3.2@26.975,3.85
  Bottom Layer w0.25: C1.1@6.81,26.5 6.96,26.35 6.96,25.212 U1.8@7,25.172 ; C5.1@6.81,42.5 6.96,42.35 6.96,41.212 U3.8@7,41.172 ; U4.8@43,36.828 43.04,36.788 43.04,35.65 C7.1@43.19,35.5 ; C3.1@43.038,19.652 U2.8@43.038,20.79
  Bottom Layer w0.254: U2.8@43,20.828 U2.8@43.038,20.79 ; C3.1@43.038,19.652 C3.1@43.19,19.5
  Bottom Layer w0.279: C1_CH1.2@19.585,11.8 19.585,11.82 C1_CH1.2@19.75,11.985 ; C1_CH3.2@19.585,27.8 19.585,27.82 C1_CH3.2@19.75,27.985 ; C1_CH2.2@35.585,11.8 35.585,11.82 C1_CH2.2@35.75,11.985 ; C1_CH4.2@35.585,27.8 35.585,27.82 C1_CH4.2@35.75,27.985
  Bottom Layer w0.6: C1.1@6.81,26.5 v1(6.81,27.1) ; C5.1@6.81,42.5 v1(6.81,43.1) ; U17_CH1.13@19.75,12.885 v1(20.2,12.885) ; U17_CH3.13@19.75,28.885 v1(20.2,28.885) ; v2(22.45,44.9) 22.5,44.85 J1.5@22.5,43.25 ; C9.1@27.45,5.135 v1(28.025,5.135) ; U17_CH2.13@35.75,12.885 v1(36.2,12.885) ; U17_CH4.13@35.75,28.885 v1(36.2,28.885) ; v1(43.19,18.9) C3.1@43.19,19.5 ; v1(43.19,34.9) C7.1@43.19,35.5
  other v1: 10.125,10.3 14.125,10.3 18.125,10.3 22.125,10.3 26.125,10.3 30.125,10.3 34.125,10.3 38.125,10.3 10.125,26.3 14.125,26.3 18.125,26.3 22.125,26.3 26.125,26.3 30.125,26.3 34.125,26.3 38.125,26.3
-5V: C2.1 C4.1 C6.1 C8.1 D2.2 J1.10 U1.3 U1.6 U2.3 U2.6 U3.3 U3.6 U4.3 U4.6 | length 112.8
  Top Layer w0.2: v1(6,26.25) 8.598,26.25 ; v1(6,42.25) 7.987,40.263 ; v1@6.798,34.912 6.798,39.073 7.987,40.263 ; v1(6.81,18.9) 6.838,18.928 6.838,19.5 8.598,21.26 8.598,32.39 6.81,34.178 v1(6.81,34.9) ; v1(44,19.75) 41.775,21.975 41.775,25.125 43.19,26.54 43.19,27.872 41.375,29.687 41.375,35.75 ; v1(44,35.75) 41.375,35.75 ; 7.987,40.263 11.65,43.925 24.35,43.925 26.175,45.75 26.675,45.75 28.5,43.925 42.365,43.925 v1(43.19,43.1) 43.19,41.903 41.375,40.088 41.375,35.75
  Bottom Layer w0.2: U1.6@6,25.172 v1(6,26.25) ; U3.6@6,41.172 v1(6,42.25) ; v1(44,19.75) U2.6@44,20.828 44,21.36 U2.6@44.065,21.425 ; v1(44,35.75) U4.6@44,36.828
  Bottom Layer w0.25: C2.1@6.81,19.5 6.96,19.65 6.96,20.788 U1.3@7,20.828 ; C6.1@6.81,35.5 6.96,35.65 6.96,36.788 U3.3@7,36.828 ; U4.3@43,41.172 43.04,41.212 43.04,42.35 C8.1@43.19,42.5 ; U2.3@43.038,25.21 C4.1@43.038,26.348
  Bottom Layer w0.254: U2.3@43,25.172 U2.3@43.038,25.21 ; C4.1@43.038,26.348 C4.1@43.19,26.5
  Bottom Layer w0.3: D2.2@6.7,17.075 6.755,17.13 6.755,18.845 v1(6.81,18.9)
  Bottom Layer w0.6: v1@6.8,34.9 v1@6.805,34.905 ; v1(6.81,18.9) C2.1@6.81,19.5 ; v1(6.81,34.9) C6.1@6.81,35.5 ; J1.10@27.5,43.25 27.5,44.226 27.508,44.233 27.508,44.858 v2(27.55,44.9) ; C4.1@43.19,26.5 v1(43.19,27.1) ; C8.1@43.19,42.5 v1(43.19,43.1)
A0: U1.4 U2.4 U3.4 U4.4 U5.9 | length 109.8
  Top Layer w0.2: v1(6.2,38.05) 6.2,37.038 5.1,35.938 5.1,24.475 6.65,22.925 v1(6.65,22) 6.65,21.25 5.775,20.375 5.775,12.725 15.45,3.05 v1(24.473,3.05) 34.788,3.05 44.773,13.035 44.773,21.752 43.35,23.175 v1(43.35,24) 43.35,24.875 44.725,26.25 44.725,36.85 43.35,38.225 v1(43.35,40)
  Bottom Layer w0.2: v1(6.2,38.05) 6.2,37.942 6.435,37.707 6.435,36.893 U3.4@6.5,36.828 ; U1.4@6.5,20.828 6.565,20.893 6.565,21.807 6.65,21.892 v1(6.65,22) ; v1(24.473,3.05) 24.498,3.075 24.498,5.052 U5.9@24.5,5.054 ; v1(43.35,24) 43.35,24.108 43.435,24.193 43.435,25.107 U2.4@43.5,25.172 ; v1(43.35,40) 43.35,40.108 43.435,40.193 43.435,41.107 U4.4@43.5,41.172 ; v1@43.373,40 v1@43.436,40.063
A1: U1.5 U2.5 U3.5 U4.5 U5.8 | length 110.4
  Top Layer w0.2: v1(5.425,38.05) 5.425,36.725 4.773,36.073 4.773,24.327 5.85,23.25 v1(5.85,22) 5.85,20.912 5.448,20.51 5.448,12.59 15.515,2.523 v1@24.998,2.523 ; v1@24.998,2.523 34.723,2.523 45.1,12.9 45.1,21.925 44.15,22.875 v1(44.15,24) 44.15,25.175 45.052,26.077 45.052,36.985 44.15,37.887 v1(44.15,40)
  Bottom Layer w0.2: v1(5.425,38.05) 5.425,38 6,37.425 U3.5@6,36.828 ; v1(5.85,22) 5.85,21.892 5.935,21.807 5.935,20.893 U1.5@6,20.828 ; v1@24.998,2.523 v1@25.027,2.552 ; U5.8@25,5.054 25.002,5.052 25.002,2.546 25.012,2.536 v1(25.025,2.523) ; U2.5@44,25.172 44.065,25.107 44.065,24.193 44.15,24.108 v1(44.15,24) ; U4.5@44,41.172 44.065,41.107 44.065,40.193 44.15,40.108 v1(44.15,40)
DIN: U5.13 U17_CH1.18 U17_CH2.18 U17_CH3.18 U17_CH4.18 | length 70.3
  Top Layer w0.2: v1(22.725,6.475) 22.667,6.417 22.125,6.417 21.998,6.29 21.998,5.227 22.275,4.95 24.025,4.95 25.3,6.225 25.3,6.675 25.3,6.75 25.3,7.1 25.3,24.6 ; v1(23.425,25.1) 24.8,25.1 25.3,24.6 ; 25.3,7.075 25.325,7.1 v1(29.4,7.1) ; v1(26.775,25.05) 26.325,24.6 25.3,24.6
  Bottom Layer w0.2: U17_CH1.18@17.25,12.885 17.25,9.875 20.65,6.475 v1(22.725,6.475) 22.798,6.402 23.652,6.402 U5.13@23.654,6.4 ; U17_CH3.18@17.25,28.885 17.25,26.075 18.225,25.1 v1(23.425,25.1) ; v1(26.775,25.05) 26.873,25.05 27.148,25.325 32.425,25.325 33.175,26.075 33.175,28.131 33.21,28.167 33.21,28.845 U17_CH4.18@33.25,28.885 ; v1(29.4,7.1) 29.477,7.023 30.848,7.023 33.117,9.292 ; 33.125,9.292 33.125,12.163 33.25,12.288 U17_CH2.18@33.25,12.885
GND: C1.2 C1_CH1.1 C1_CH2.1 C1_CH3.1 C1_CH4.1 C2.2 C3.2 C4.2 C5.2 C6.2 C7.2 C8.2 C9.2 D1.2 J1.2 J1.4 J1.6 J1.9 J1.11 J1.13 P1.3 R2.2 U1.2 U1.9 U1_CH1.3 U1_CH2.3 U1_CH3.3 U1_CH4.3 U2.2 U2.9 U2_CH1.3 U2_CH2.3 U2_CH3.3 U2_CH4.3 U3.2 U3.9 U3_CH1.3 U3_CH2.3 U3_CH3.3 U3_CH4.3 U4.2 U4.9 U4_CH1.3 U4_CH2.3 U4_CH3.3 U4_CH4.3 U5.4 U5_CH1.3 U5_CH2.3 U5_CH3.3 U5_CH4.3 U6_CH1.3 U6_CH2.3 U6_CH3.3 U6_CH4.3 U7_CH1.3 U7_CH2.3 U7_CH3.3 U7_CH4.3 U8_CH1.3 U8_CH2.3 U8_CH3.3 U8_CH4.3 U9_CH1.3 U9_CH2.3 U9_CH3.3 U9_CH4.3 U10_CH1.3 U10_CH2.3 U10_CH3.3 U10_CH4.3 U11_CH1.3 U11_CH2.3 U11_CH3.3 U11_CH4.3 U12_CH1.3 U12_CH2.3 U12_CH3.3 U12_CH4.3 U13_CH1.3 U13_CH2.3 U13_CH3.3 U13_CH4.3 U14_CH1.3 U14_CH2.3 U14_CH3.3 U14_CH4.3 U15_CH1.3 U15_CH2.3 U15_CH3.3 U15_CH4.3 U16_CH1.3 U16_CH2.3 U16_CH3.3 U16_CH4.3 U17_CH1.23 U17_CH1.24 U17_CH2.23 U17_CH2.24 U17_CH3.23 U17_CH3.24 U17_CH4.23 U17_CH4.24 | length 147.4
  Top Layer w0.2: v1(7.69,18.9) 7.69,19.89 8.925,21.125 8.925,32.525 7.69,33.76 v1(7.69,34.9) 7.125,35.465 7.125,38.938 11.762,43.575 25.1,43.575 26.425,44.9 27.75,43.575 41.833,43.575 v1(42.31,43.098) 42.31,41.485 41.048,40.223 41.048,29.552 42.31,28.29 v1(42.31,27.1) ; U1_CH1.3@11.5,10.23 11.5,10.2 v1@11.875,10.2 ; U5_CH1.3@11.5,14.23 12.578,14.23 13.125,13.683 v1(13.125,13.6) ; v1(11.5,17.6) U9_CH1.3@11.5,18.23 ; U13_CH1.3@11.5,22.23 11.5,22.225 v1(11.875,22.225) ; U1_CH3.3@11.5,26.23 11.5,26.2 v1@11.875,26.2 ; U5_CH3.3@11.5,30.23 12.578,30.23 13.125,29.683 v1(13.125,29.6) ; v1(11.5,33.6) U9_CH3.3@11.5,34.23 ; U13_CH3.3@11.5,38.23 11.5,38.225 v1(11.875,38.225) ; U2_CH1.3@15.5,10.23 15.5,10.216 v1@15.873,10.216 ; U6_CH1.3@15.5,14.23 15.5,14.225 v1(15.875,14.225) ; U10_CH1.3@15.5,18.23 15.5,18.285 v1(15.815,18.285) ; U14_CH1.3@15.5,22.23 15.5,22.455 15.621,22.455 15.95,22.784 15.95,22.815 16.061,22.926 v1(16.061,23.034) ; U2_CH3.3@15.5,26.23 15.5,26.216 v1@15.873,26.216 ; U6_CH3.3@15.5,30.23 15.5,30.225 v1(15.875,30.225) ; U10_CH3.3@15.5,34.23 15.5,34.285 v1(15.815,34.285) ; U14_CH3.3@15.5,38.23 15.5,38.455 15.621,38.455 15.95,38.784 15.95,38.815 16.061,38.926 v1(16.061,39.034) ; U3_CH1.3@19.5,10.23 19.5,10.225 v1@19.875,10.225 ; U7_CH1.3@19.5,14.23 19.5,14.225 v1(19.875,14.225) ; U11_CH1.3@19.5,18.23 19.5,18.005 19.666,17.839 19.798,17.839 v1(19.875,17.763) ; U15_CH1.3@19.5,22.23 19.5,22.329 v1(19.875,22.329) ; U3_CH3.3@19.5,26.23 19.5,26.225 v1@19.875,26.225 ; U7_CH3.3@19.5,30.23 19.5,30.225 v1(19.875,30.225) ; U11_CH3.3@19.5,34.23 19.5,34.005 19.666,33.839 19.798,33.839 v1(19.875,33.763) ; U15_CH3.3@19.5,38.23 19.5,38.329 v1(19.875,38.329) ; U4_CH1.3@23.5,10.23 23.5,10.2 v1@23.875,10.2 ; U8_CH1.3@23.5,14.225 U8_CH1.3@23.5,14.23 23.5,14.25 v1(23.875,14.25) ; U12_CH1.3@23.5,18.23 23.5,18.225 v1(23.875,18.225) ; U16_CH1.3@23.5,22.23 23.5,22.225 v1(23.875,22.225) ; U4_CH3.3@23.5,26.23 23.5,26.2 v1@23.875,26.2 ; U8_CH3.3@23.5,30.225 U8_CH3.3@23.5,30.23 23.5,30.25 v1(23.875,30.25) ; U12_CH3.3@23.5,34.23 23.5,34.225 v1(23.875,34.225) ; U16_CH3.3@23.5,38.23 23.5,38.225 v1(23.875,38.225) ; U1_CH2.3@27.5,10.23 27.5,10.2 v1@27.875,10.2 ; U5_CH2.3@27.5,14.23 28.578,14.23 29.125,13.683 v1(29.125,13.6) ; v1(27.5,17.6) U9_CH2.3@27.5,18.23 ; U13_CH2.3@27.5,22.23 27.5,22.225 v1(27.875,22.225) ; U1_CH4.3@27.5,26.23 27.5,26.2 v1@27.875,26.2 ; U5_CH4.3@27.5,30.23 28.578,30.23 29.125,29.683 v1(29.125,29.6) ; v1(27.5,33.6) U9_CH4.3@27.5,34.23 ; U13_CH4.3@27.5,38.23 27.5,38.225 v1(27.875,38.225) ; U2_CH2.3@31.5,10.23 31.5,10.216 v1@31.873,10.216 ; U6_CH2.3@31.5,14.23 31.5,14.225 v1(31.875,14.225) ; U10_CH2.3@31.5,18.23 31.5,18.285 v1(31.815,18.285) ; U14_CH2.3@31.5,22.23 31.5,22.455 31.621,22.455 31.95,22.784 31.95,22.815 32.061,22.926 v1(32.061,23.034) ; U2_CH4.3@31.5,26.23 31.5,26.216 v1@31.873,26.216 ; U6_CH4.3@31.5,30.23 31.5,30.225 v1(31.875,30.225) ; U10_CH4.3@31.5,34.23 31.5,34.285 v1(31.815,34.285) ; U14_CH4.3@31.5,38.23 31.5,38.455 31.621,38.455 31.95,38.784 31.95,38.815 32.061,38.926 v1(32.061,39.034) ; U3_CH2.3@35.5,10.23 35.5,10.225 v1@35.875,10.225 ; U7_CH2.3@35.5,14.23 35.5,14.225 v1(35.875,14.225) ; U11_CH2.3@35.5,18.23 35.5,18.005 35.666,17.839 35.798,17.839 v1(35.875,17.763) ; U15_CH2.3@35.5,22.23 35.5,22.329 v1(35.875,22.329) ; U3_CH4.3@35.5,26.23 35.5,26.225 v1@35.875,26.225 ; U7_CH4.3@35.5,30.23 35.5,30.225 v1(35.875,30.225) ; U11_CH4.3@35.5,34.23 35.5,34.005 35.666,33.839 35.798,33.839 v1(35.875,33.763) ; U15_CH4.3@35.5,38.23 35.5,38.329 v1(35.875,38.329) ; U4_CH2.3@39.5,10.23 39.5,10.2 v1@39.875,10.2 ; U8_CH2.3@39.5,14.225 U8_CH2.3@39.5,14.23 39.5,14.25 v1(39.875,14.25) ; U12_CH2.3@39.5,18.23 39.5,18.225 v1(39.875,18.225) ; U16_CH2.3@39.5,22.23 39.5,22.225 v1(39.875,22.225) ; U4_CH4.3@39.5,26.23 39.5,26.2 v1@39.875,26.2 ; U8_CH4.3@39.5,30.225 U8_CH4.3@39.5,30.23 39.5,30.25 v1(39.875,30.25) ; U12_CH4.3@39.5,34.23 39.5,34.225 v1(39.875,34.225) ; U16_CH4.3@39.5,38.23 39.5,38.225 v1(39.875,38.225)
  Bottom Layer w0.2: R2.2@6.7,13.625 6.7,13.55 7.173,13.077 7.173,12.877 v1(7.25,12.8) 7.327,12.877 7.327,13.077 7.8,13.55 D1.2@7.8,13.625 ; U17_CH1.24@14.21,12.825 14.24,12.854 U17_CH1.24@14.24,12.875 ; U17_CH3.24@14.21,28.825 14.24,28.854 U17_CH3.24@14.24,28.875 ; U5.4@26.346,5.9 27.285,5.9 C9.2@27.4,6.015 ; U17_CH2.24@30.21,12.825 30.24,12.854 U17_CH2.24@30.24,12.875 ; U17_CH4.24@30.21,28.825 30.24,28.854 U17_CH4.24@30.24,28.875
  Bottom Layer w0.25: U1.2@7.5,20.828 7.54,20.788 7.54,19.65 C2.2@7.69,19.5 ; U1.9@7.5,25.172 7.54,25.212 7.54,26.35 C1.2@7.69,26.5 ; U3.2@7.5,36.828 7.54,36.788 7.54,35.65 C6.2@7.69,35.5 ; U3.9@7.5,41.172 7.54,41.212 7.54,42.35 C5.2@7.69,42.5 ; C4.2@42.31,26.5 42.46,26.35 42.46,25.212 U2.2@42.462,25.21 ; C7.2@42.31,35.5 42.46,35.65 42.46,36.788 U4.9@42.5,36.828 ; C8.2@42.31,42.5 42.46,42.35 42.46,41.212 U4.2@42.5,41.172 ; C3.2@42.462,19.652 U2.9@42.462,20.79
  Bottom Layer w0.254: C3.2@42.31,19.5 C3.2@42.462,19.652 ; U2.9@42.462,20.79 U2.9@42.5,20.828 ; U2.2@42.462,25.21 U2.2@42.5,25.172
  Bottom Layer w0.6: v1(7.69,18.9) C2.2@7.69,19.5 ; C1.2@7.69,26.5 v1(7.69,27.1) ; v1(7.69,34.9) C6.2@7.69,35.5 ; C5.2@7.69,42.5 v1(7.69,43.1) ; v1(13.8,12.885) U17_CH1.24@14.25,12.885 ; v1(13.8,28.885) U17_CH3.24@14.25,28.885 ; J1.2@19.5,43.25 v2(19.5,44.9) ; v1(20.47,11.2) C1_CH1.1@20.47,11.8 ; v1(20.47,27.2) C1_CH3.1@20.47,27.8 ; v2(21.5,41.6) J1.4@21.5,43.25 ; J1.6@23.5,43.25 23.5,44.85 v2(23.55,44.9) ; v2(26.45,44.9) 26.5,44.85 J1.9@26.5,43.25 ; C9.2@27.4,6.015 v1(28.025,6.015) ; v2(28.5,41.6) J1.11@28.5,43.25 ; v1(29.8,12.885) U17_CH2.24@30.25,12.885 ; v1(29.8,28.885) U17_CH4.24@30.25,28.885 ; J1.13@30.5,43.25 v2(30.5,44.9) ; v1(36.47,11.2) C1_CH2.1@36.47,11.8 ; v1(36.47,27.2) C1_CH4.1@36.47,27.8 ; v1(42.31,18.9) C3.2@42.31,19.5 ; C4.2@42.31,26.5 v1(42.31,27.1) ; v1(42.31,34.9) C7.2@42.31,35.5 ; C8.2@42.31,42.5 v1(42.31,43.098)
  other v1: 11.875,10.3 15.873,10.3 19.875,10.3 23.875,10.3 27.875,10.3 31.873,10.3 35.875,10.3 39.875,10.3 11.875,26.3 15.873,26.3 19.875,26.3 23.875,26.3 27.875,26.3 31.873,26.3 35.875,26.3 39.875,26.3
LED: D3.2 U5.7 | length 1.5
  Bottom Layer w0.2: U5.7@25.5,5.054 25.5,4.4 25.775,4.125 25.85,4.125 26.05,3.925 D3.2@26.05,3.85
NetD1_1: D1.1 R1.1 | length 1.2
  Bottom Layer w0.3: D1.1@7.8,14.775 R1.1@7.8,15.925
NetD2_1: D2.1 R2.1 | length 1.2
  Bottom Layer w0.3: R2.1@6.7,14.775 D2.1@6.7,15.925
NetD3_1: D3.1 R3.1 | length 0.9
  Bottom Layer w0.4: D3.1@26.05,2.7 R3.1@26.975,2.7
NetU1_1: U1.1 U17_CH1.41 | length 15.2
  Bottom Layer w0.2: U1.1@8,20.828 8,23.395 9.83,25.225 14.7,25.225 16.725,23.2 16.725,22.675 16.25,22.2 U17_CH1.41@16.25,21.115
NetU1_10: U1.10 U17_CH1.43 | length 12.8
  Bottom Layer w0.2: U1.10@8,25.172 8,25.56 8.065,25.625 14.875,25.625 17.1,23.4 17.1,22.075 17.21,21.965 17.21,21.154 U17_CH1.43@17.25,21.115
NetU1_CH1_4: U1_CH1.4 U17_CH1.12 | length 10.8
  Top Layer w0.2: U1_CH1.4@11.508,11.762 11.862,11.762 12.375,12.275 14.045,12.275 15.37,13.6 v1(20.825,13.6)
  Bottom Layer w0.2: v1(20.825,13.6) 20.825,13.612 21.115,13.902 U17_CH1.12@21.115,14.25
NetU1_CH1_6: U1_CH1.6 U17_CH1.25 | length 4.3
  Top Layer w0.2: U1_CH1.6@10.5,11.77 10.5,12.32 11.53,13.35 v1(12.2,13.35)
  Bottom Layer w0.2: v1(12.2,13.35) 12.123,13.427 12.123,14.085 12.288,14.25 U17_CH1.25@12.885,14.25
NetU1_CH2_4: U1_CH2.4 U17_CH2.12 | length 10.8
  Top Layer w0.2: U1_CH2.4@27.508,11.762 27.862,11.762 28.375,12.275 30.045,12.275 31.37,13.6 v1(36.825,13.6)
  Bottom Layer w0.2: v1(36.825,13.6) 36.825,13.612 37.115,13.902 U17_CH2.12@37.115,14.25
NetU1_CH2_6: U1_CH2.6 U17_CH2.25 | length 4.3
  Top Layer w0.2: U1_CH2.6@26.5,11.77 26.5,12.32 27.53,13.35 v1(28.2,13.35)
  Bottom Layer w0.2: v1(28.2,13.35) 28.123,13.427 28.123,14.085 28.288,14.25 U17_CH2.25@28.885,14.25
NetU1_CH3_4: U1_CH3.4 U17_CH3.12 | length 10.8
  Top Layer w0.2: U1_CH3.4@11.508,27.762 11.862,27.762 12.375,28.275 14.045,28.275 15.37,29.6 v1(20.825,29.6)
  Bottom Layer w0.2: v1(20.825,29.6) 20.825,29.612 21.115,29.902 U17_CH3.12@21.115,30.25
NetU1_CH3_6: U1_CH3.6 U17_CH3.25 | length 4.3
  Top Layer w0.2: U1_CH3.6@10.5,27.77 10.5,28.32 11.53,29.35 v1(12.2,29.35)
  Bottom Layer w0.2: v1(12.2,29.35) 12.123,29.427 12.123,30.085 12.288,30.25 U17_CH3.25@12.885,30.25
NetU1_CH4_4: U1_CH4.4 U17_CH4.12 | length 10.8
  Top Layer w0.2: U1_CH4.4@27.508,27.762 27.862,27.762 28.375,28.275 30.045,28.275 31.37,29.6 v1(36.825,29.6)
  Bottom Layer w0.2: v1(36.825,29.6) 36.825,29.612 37.115,29.902 U17_CH4.12@37.115,30.25
NetU1_CH4_6: U1_CH4.6 U17_CH4.25 | length 4.3
  Top Layer w0.2: U1_CH4.6@26.5,27.77 26.5,28.32 27.53,29.35 v1(28.2,29.35)
  Bottom Layer w0.2: v1(28.2,29.35) 28.123,29.427 28.123,30.085 28.288,30.25 U17_CH4.25@28.885,30.25
NetU2_1: U2.1 U17_CH2.41 | length 13.1
  Bottom Layer w0.2: U17_CH2.41@32.25,21.115 32.25,22.2 32.725,22.675 32.725,24.2 33.45,24.925 41.935,24.925 U2.1@42,24.99 ; U2.1@41.935,24.95 42,25.015 U2.1@42,25.172
NetU2_10: U2.10 U17_CH2.43 | length 15.1
  Bottom Layer w0.2: U17_CH2.43@33.25,21.115 33.21,21.154 33.21,21.965 33.1,22.075 33.1,24.025 33.6,24.525 40.895,24.525 42,23.42 U2.10@42,20.828
NetU2_CH1_4: U2_CH1.4 U17_CH1.11 | length 9.5
  Top Layer w0.2: U2_CH1.4@15.508,11.762 15.508,11.987 15.869,12.348 20.538,12.348 21.74,13.55 v1(21.8,13.55)
  Bottom Layer w0.2: U17_CH1.11@21.115,14.75 21.154,14.71 21.865,14.71 22.284,14.291 22.284,14.034 v1(21.8,13.55)
NetU2_CH1_6: U2_CH1.6 U17_CH1.26 | length 6.5
  Top Layer w0.2: v1(13.575,11.577) 14.5,11.577 14.5,11.545 U2_CH1.6@14.5,11.77
  Bottom Layer w0.2: U17_CH1.26@12.885,14.75 12.288,14.75 12.249,14.71 12.148,14.71 11.575,14.137 11.575,13.05 13.125,11.5 ; 13.125,11.5 13.498,11.5 v1(13.575,11.577)
NetU2_CH2_4: U2_CH2.4 U17_CH2.11 | length 9.5
  Top Layer w0.2: U2_CH2.4@31.508,11.762 31.508,11.987 31.869,12.348 36.538,12.348 37.74,13.55 v1(37.8,13.55)
  Bottom Layer w0.2: U17_CH2.11@37.115,14.75 37.154,14.71 37.865,14.71 38.284,14.291 38.284,14.034 v1(37.8,13.55)
NetU2_CH2_6: U2_CH2.6 U17_CH2.26 | length 6.5
  Top Layer w0.2: v1(29.575,11.577) 30.5,11.577 30.5,11.545 U2_CH2.6@30.5,11.77
  Bottom Layer w0.2: U17_CH2.26@28.885,14.75 28.288,14.75 28.249,14.71 28.148,14.71 27.575,14.137 27.575,13.05 29.125,11.5 29.498,11.5 v1(29.575,11.577)
NetU2_CH3_4: U2_CH3.4 U17_CH3.11 | length 9.5
  Top Layer w0.2: U2_CH3.4@15.508,27.762 15.508,27.987 15.869,28.348 20.538,28.348 21.74,29.55 v1(21.8,29.55)
  Bottom Layer w0.2: U17_CH3.11@21.115,30.75 21.154,30.71 21.865,30.71 22.284,30.291 22.284,30.034 v1(21.8,29.55)
NetU2_CH3_6: U2_CH3.6 U17_CH3.26 | length 6.5
  Top Layer w0.2: v1(13.575,27.577) 14.5,27.577 14.5,27.545 U2_CH3.6@14.5,27.77
  Bottom Layer w0.2: U17_CH3.26@12.885,30.75 12.288,30.75 12.249,30.71 12.148,30.71 11.575,30.137 11.575,29.05 13.125,27.5 ; 13.125,27.5 13.498,27.5 v1(13.575,27.577)
NetU2_CH4_4: U2_CH4.4 U17_CH4.11 | length 9.5
  Top Layer w0.2: U2_CH4.4@31.508,27.762 31.508,27.987 31.869,28.348 36.538,28.348 37.74,29.55 v1(37.8,29.55)
  Bottom Layer w0.2: U17_CH4.11@37.115,30.75 37.154,30.71 37.865,30.71 38.284,30.291 38.284,30.034 v1(37.8,29.55)
NetU2_CH4_6: U2_CH4.6 U17_CH4.26 | length 6.5
  Top Layer w0.2: v1(29.575,27.577) 30.5,27.577 30.5,27.545 U2_CH4.6@30.5,27.77
  Bottom Layer w0.2: U17_CH4.26@28.885,30.75 28.288,30.75 28.249,30.71 28.148,30.71 27.575,30.137 27.575,29.05 29.125,27.5 ; 29.125,27.5 29.498,27.5 v1(29.575,27.577)
NetU3_1: U3.1 U17_CH3.41 | length 15.1
  Bottom Layer w0.2: U3.1@8,36.828 8,39.395 9.803,41.198 14.727,41.198 16.7,39.225 ; U17_CH3.41@16.25,37.115 16.25,38.2 16.725,38.675 16.725,39.2
NetU3_10: U3.10 U17_CH3.43 | length 12.8
  Bottom Layer w0.2: U3.10@8,41.172 8,41.56 8.065,41.625 14.875,41.625 17.1,39.4 17.1,38.075 17.21,37.965 17.21,37.154 U17_CH3.43@17.25,37.115
NetU3_CH1_4: U3_CH1.4 U17_CH1.10 | length 6.8
  Top Layer w0.2: U3_CH1.4@19.508,11.762 19.508,11.925 20.992,11.925 21.442,12.375 v1(21.55,12.375)
  Bottom Layer w0.2: U17_CH1.10@21.115,15.25 21.154,15.21 21.965,15.21 22.623,14.552 22.623,13.448 v1(21.55,12.375)
NetU3_CH1_6: U3_CH1.6 U17_CH1.27 | length 12.1
  Top Layer w0.2: v1(16.175,11.025) 16.942,11.025 17.687,11.77 U3_CH1.6@18.5,11.77
  Bottom Layer w0.2: U17_CH1.27@12.885,15.25 12.845,15.21 11.985,15.21 11.2,14.425 11.2,12.8 13.05,10.95 16.1,10.95 v1(16.175,11.025)